# EAGLE board Project Hail Fally  (EAGLE 9.7.0)

Size 260.23 x 185.66 mm. Coordinates in mm from the lower left corner, seen from the top.
Outline: 0,0 260.23,0 260.23,185.66 0,185.66 0,0
Copper layers (1*16): Top 0.035mm / dielectric 1.5mm / Bottom 0.035mm
Design rules "default": minimum track width 6mil, minimum drill 0.35mm, track to track 6mil, track to pad 6mil, pad to pad 6mil, via to via 6mil, smd to smd 6mil, copper to edge 40mil, drill to drill 6mil, minimum pad ring 10mil, minimum via ring 8mil, stop-mask expansion 4mil, vias tented up to drill 0mil, thermal gap 10mil

## Footprints (pad centres in the part's own frame; a part is rotated, then mirrored left to right if it is on the bottom)
BATTERY-GENERIC = drill 1.118 pad 3.15 octagon: + 2.54,0; - -2.54,0
LEDRD254W60D565H860B = drill 0.981 pad 1.581: 1 -1.27,0; 2 1.27,0
HC-SR04 = drill 1.016 long: 1 -3.81,0; 2 -1.27,0; 3 1.27,0; 4 3.81,0
MQ-XX-SOCKET = drill 1.27: 1 -6.223,6.223; 2 -8.788,0; 3 -6.223,-6.223; 4 6.223,-6.223; 5 8.788,0; 6 6.223,6.223
PIEZO = drill 1 pad 1.6: 1 -3.5,0; 2 3.5,0
RESAD1016W63L850D250B = drill 0.83 pad 1.43: 1 -5.08,0; 2 5.08,0
HA-06-SM065 = drill 1 pad 1.676: 1 -2.54,-2.54; 2 0,2.54; 3 2.54,-2.54
DIP762W53P254L1969H508Q16B = drill 0.743 pad 1.343: 1 -3.81,8.89; 2 -3.81,6.35; 3 -3.81,3.81; 4 -3.81,1.27; 5 -3.81,-1.27; 6 -3.81,-3.81; 7 -3.81,-6.35; 8 -3.81,-8.89; 9 3.81,-8.89; 10 3.81,-6.35; 11 3.81,-3.81; 12 3.81,-1.27; 13 3.81,1.27; 14 3.81,3.81; 15 3.81,6.35; 16 3.81,8.89
TO92 = drill 0.813 octagon: 1 -1.27,0; 2 0,1.905; 3 1.27,0
JHD-162A = drill 1.016 long: 1 -19.05,0; 2 -16.51,0; 3 -13.97,0; 4 -11.43,0; 5 -8.89,0; 6 -6.35,0; 7 -3.81,0; 8 -1.27,0; 9 1.27,0; 10 3.81,0; 11 6.35,0; 12 8.89,0; 13 11.43,0; 14 13.97,0; 15 16.51,0; 16 19.05,0
ARDUINO-UNO-R3-SHIELD = drill 1.016 pad 1.88: 3.3V 24.13,-2.54; 5V 24.13,0; A0 24.13,12.7; A1 24.13,15.24; A2 24.13,17.78; A3 24.13,20.32; A4 24.13,22.86; A5 24.13,25.4; AREF -24.13,-13.97; D2 -24.13,20.32; D3 -24.13,17.78; D4 -24.13,15.24; D5 -24.13,12.7; D6 -24.13,10.16; D7 -24.13,7.62; D8 -24.13,3.81; D9 -24.13,1.27; D10 -24.13,-1.27; D11 -24.13,-3.81; D12 -24.13,-6.35; D13 -24.13,-8.89; GND@0 24.13,2.54; GND@1 24.13,5.08; GND@2 -24.13,-11.43; IOREF 24.13,-7.62; NC 24.13,-10.16; RES 24.13,-5.08; RX -24.13,25.4; SCL -24.13,-19.05; SDA -24.13,-16.51; TX -24.13,22.86; VIN 24.13,7.62

## Placement (x,y rotation side)
BAT1  9V  [BATTERY-GENERIC]  65.48,119.38 90 top
D1  RED  [LEDRD254W60D565H860B]  101.39,36.17 180 top
DIST1  DISTANCE-SENSOR-4PINHC-SR04  [HC-SR04]  26.04,28.97 180 top
GAS1  GAS-SENSORMQ-XX-SOCKET  [MQ-XX-SOCKET]  55.17,57.64 270 top
PIEZO1  PIEZO  [PIEZO]  76.71,13.58 0 top
R1  1k  [RESAD1016W63L850D250B]  221.13,135.76 90 top
R3  1k  [RESAD1016W63L850D250B]  60.25,41.13 90 top
R4  1k  [RESAD1016W63L850D250B]  107.74,36.17 180 top
RPOT1  250k  [HA-06-SM065]  183.03,110.36 0 top
U1  L293E  [DIP762W53P254L1969H508Q16B]  136.85,170.26 0 top
U3  TMP36GT9Z_TO92  [TO92]  236.37,130.68 0 top
U4  LCD-16X2JHD-162A  [JHD-162A]  204.6,84.51 0 top
U5  ARDUINO-UNO-R3-SHIELD  [ARDUINO-UNO-R3-SHIELD]  139.39,129.62 270 top

## Library data of the parts
BAT1 DIST1 GAS1 PIEZO1 R1 R3 R4 RPOT1 U1 U3-U5 = Tinkercad
D1 = Tinkercad; CATEGORY: Opto-Electronic; SUB-CATEGORY: LED; VALUE: LED_RED

## Nets
BAT1+: BAT1.+ U1.16 U5.VIN
BAT1-: BAT1.- D1.2 DIST1.4 GAS1.5 PIEZO1.2 R3.1 U1.4 U3.1 U4.5 U4.16 U5.GND@0 U5.GND@1 U5.GND@2
PIEZO1_1: D1.1 PIEZO1.1 R4.2
U4_GND: RPOT1.3 U4.1
U4_LED+: R1.1 U4.15
U4_VO: RPOT1.2 U4.3
U5_5V: DIST1.1 GAS1.1 GAS1.2 GAS1.3 R1.2 RPOT1.1 U3.3 U4.2 U5.5V
U5_A0: U3.2 U5.A0
U5_A1: GAS1.4 GAS1.6 R3.2 U5.A1
U5_A2: DIST1.3 U5.A2
U5_A3: DIST1.2 U5.A3
U5_D3: R4.1 U5.D3
U5_D4: U4.14 U5.D4
U5_D5: U4.13 U5.D5
U5_D6: U4.12 U5.D6
U5_D7: U4.11 U5.D7
U5_D8: U4.6 U5.D8
U5_D9: U4.4 U5.D9
U5_D10: U1.15 U5.D10
U5_D11: U1.10 U5.D11
U5_D12: U1.7 U5.D12
U5_D13: U1.2 U5.D13

## Tracks (layer width: path | path; a pad name or v marks a point on that pad's centre or on a via)
BAT1+  (2 unrouted)
BAT1-  (12 unrouted)
PIEZO1_1  (2 unrouted)
U4_GND  (1 unrouted)
U4_LED+  (1 unrouted)
U4_VO  (1 unrouted)
U5_5V  (8 unrouted)
U5_A0  (1 unrouted)
U5_A1  (3 unrouted)
U5_A2  (1 unrouted)
U5_A3  (1 unrouted)
U5_D3  (1 unrouted)
U5_D4  (1 unrouted)
U5_D5  (1 unrouted)
U5_D6  (1 unrouted)
U5_D7  (1 unrouted)
U5_D8  (1 unrouted)
U5_D9  (1 unrouted)
U5_D10  (1 unrouted)
U5_D11  (1 unrouted)
U5_D12  (1 unrouted)
U5_D13  (1 unrouted)